# Altium PCB IMUCubeSL_A_Pcb.PcbDoc
Units mil, origin at the board's own origin, x right, y up, seen from the top; angles counter-clockwise.
Board outline 866.14 x 866.14 mil, 2 copper layers (Top Layer, Bottom Layer), stack 38.583 mil thick; 9 components, 18 nets, 52 pads, 48 vias.
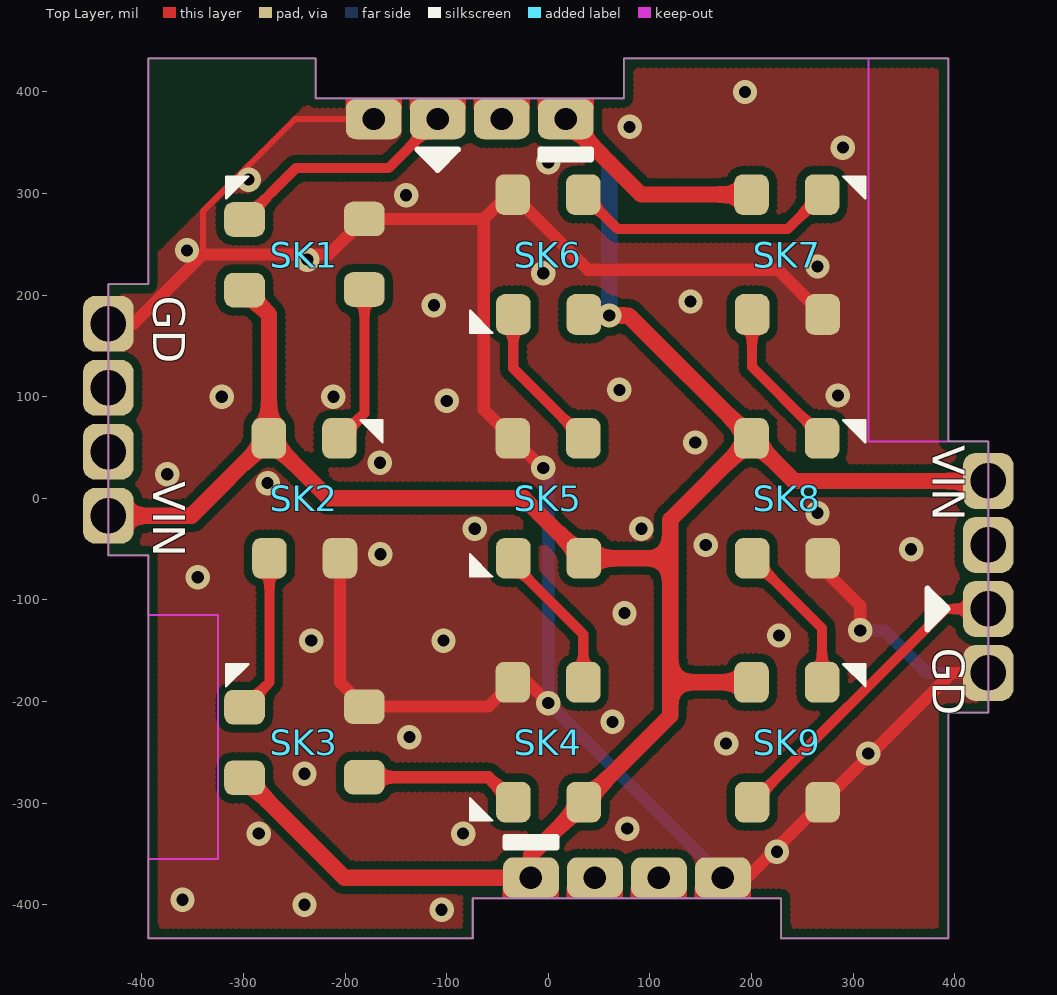
[diagram p0: Top Layer view]
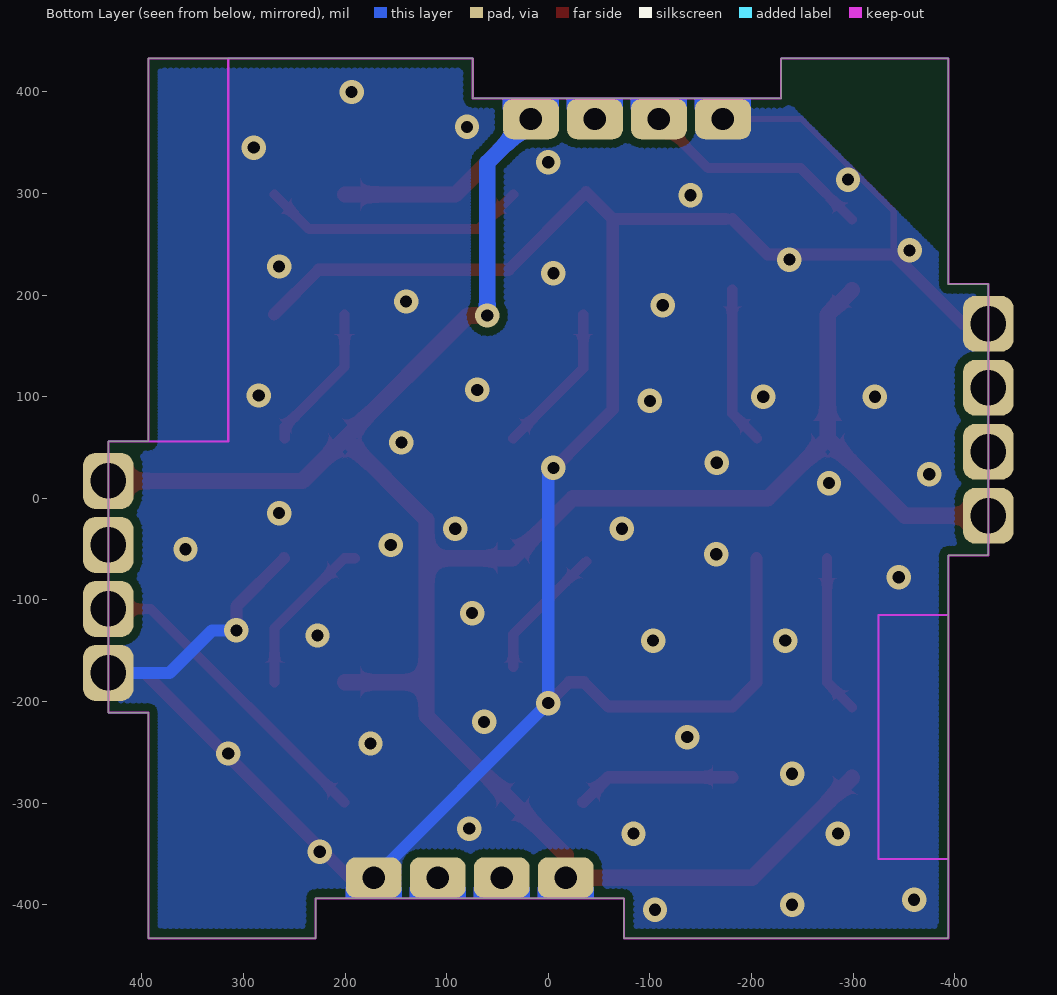
[diagram p1: Bottom Layer view, seen from below]
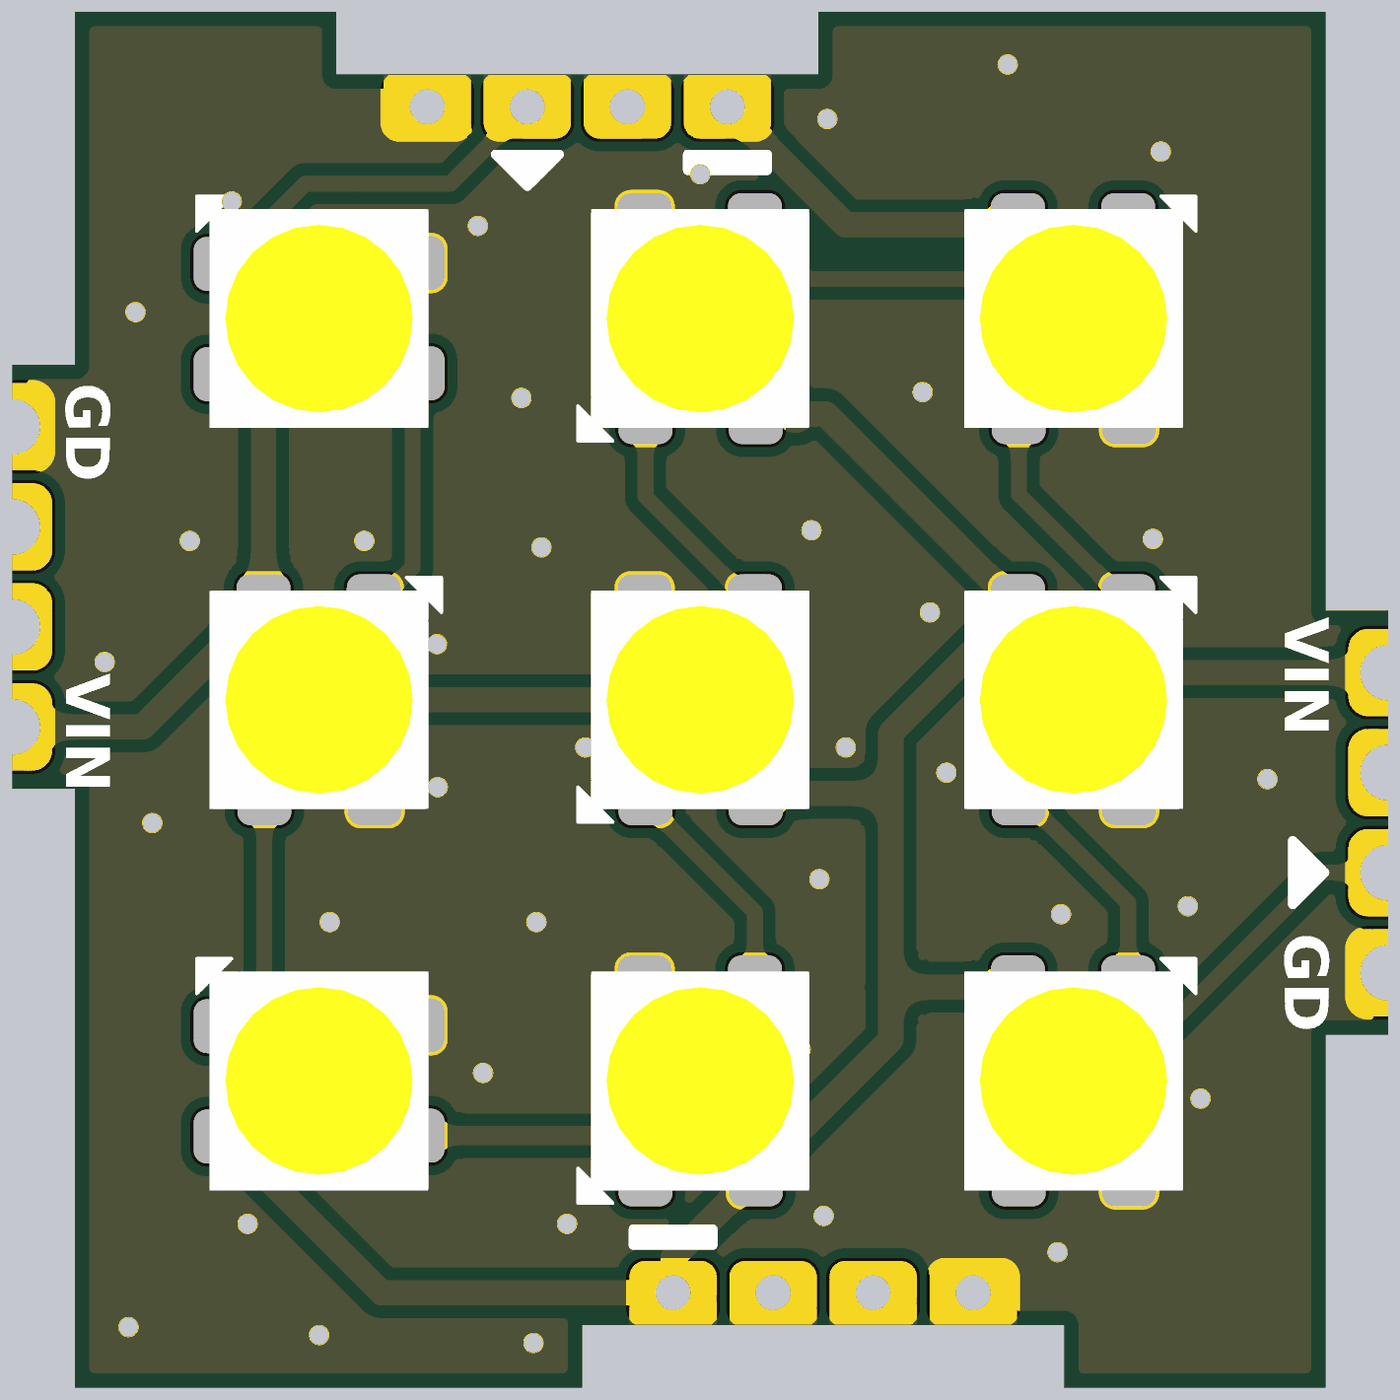
[diagram p2: 3D render of the assembled board from above, using the file's embedded part models]

## Layer stack, top to bottom
Top Solder: solder mask 0.3937, Solder Resist, Dk 3.5
Top Layer: signal copper 1.5748
Dielectric 1: dielectric 35.4331, FR-4, Dk 4.8
Bottom Layer: signal copper 1.5748
Bottom Solder: solder mask 0.3937, Solder Resist, Dk 3.5

## Board outline
-393.7,-433.07 -393.7,-56.06 -433.07,-56.06 -433.07,210.79 -393.7,210.79 -393.7,433.07 -229.09,433.07 -229.09,393.7 74.37,393.7 74.37,433.07 393.7,433.07 393.7,56.06 433.07,56.06 433.07,-210.79 393.7,-210.79 393.7,-433.07 229.09,-433.07 229.09,-393.7 -74.37,-393.7 -74.37,-433.07

## Design rules (kind name [scope] priority, off if disabled: settings)
Clearance ClearancePolygon [InPolygon] p1: gap=8
Clearance [All] p2: gap=6
ComponentClearance [All] p1: gap=0 collisioncheckmode=3 verticalgap=0 showdistances=FALSE
Height [All] p1: minheight=0 maxheight=5000 prefheight=500
HoleSize [All] p1: absolutevalues=TRUE maxlimit=200 minlimit=1 maxpercent=80.000 minpercent=20.000
HoleToHoleClearance [All] p1: gap=6 allowstackedmicrovias=TRUE
MinimumSolderMaskSliver [All] p1: minsoldermaskwidth=0
PolygonConnect [All] p1: connectstyle=Direct reliefconductorwidth=10 reliefentries=4 polygonreliefangle="90 Angle" airgapwidth=10
RoutingVias [All] p1: holewidth=12 width=24 viastyle="Through Hole" minholewidth=12 minwidth=20 maxholewidth=28 maxwidth=50
SilkToSilkClearance [All] p1: silktosilkclearance=0
SilkToSolderMaskClearance [IsPad] p1: minsilkscreentomaskgap=0 clearancetoexposedcopper=TRUE
SolderMaskExpansion [All] p1: expansion=2
Width [All] p1: maxlimit=50 minlimit=6 preferedwidth=10
23 further rules are at their usual default settings.

## Components (designator, comment, footprint, x,y, rotation, side; value= is the part's Value field where it differs from the comment)
SK1 "LED_3535_SK6812" LED_3535_4P -240,240 r180 top
SK2 "LED_3535_SK6812" LED_3535_4P -240,0 r90 top
SK3 "LED_3535_SK6812" LED_3535_4P -240,-240 r180 top
SK4 "LED_3535_SK6812" LED_3535_4P 0,-240 r270 top
SK5 "LED_3535_SK6812" LED_3535_4P 0,0 r270 top
SK6 "LED_3535_SK6812" LED_3535_4P 0,240 r270 top
SK7 "LED_3535_SK6812" LED_3535_4P 235,240 r90 top
SK8 "LED_3535_SK6812" LED_3535_4P 235,0 r90 top
SK9 "LED_3535_SK6812" LED_3535_4P 235,-240 r90 top

## Footprints (in the part's own frame and the unit in brackets; to place one, negate y for a bottom-side part, rotate by r counter-clockwise, add the part's x,y. Pads: shape width x height; smd on the part's side, far side on the other; paste and mask are expansions set on the pad)
LED_3535_4P [mil]
  rrect50% 40x34 smd: 1(-59,34.45) 2(-59,-35) 3(59,-34.45) 4(59,35)
  silkscreen extent 55,-77 77,-55, body extent -69,-69 69,69, height 26

## Part data
SK1 SK2 SK3 SK4 SK5 SK6 SK7 SK8 SK9: "LED"

## Free pads (board coordinates)
  rrect50% 50x55 hole 35: 0(-433.07,-17.13) 0(-433.07,45.87) 0(-433.07,108.86) 0(-433.07,171.85) 0(433.07,-171.85) 0(433.07,-108.86) 0(433.07,17.13) 0(433.07,-45.87)
  rrect50% 55x40 hole 22: 0(-171.85,373.37) 0(-108.86,373.37) 0(-45.87,373.37) 0(-17.13,-373.37) 0(17.13,373.37) 0(45.87,-373.37) 0(108.86,-373.37) 0(171.85,-373.37)

## Via types
v1: diameter 24, hole 12, Top Layer to Bottom Layer, 48 vias

## Nets (pads, with @x,y where several pads share a name; then routed paths per layer and width w, separated by ;. In a path a pad name is that pad's centre, name@x,y a point inside that pad or via, vN(x,y) a via of type N, cw(c..) or ccw(c..) an arc to the next point about the centre after c; other vN are vias at no path point)
3V3: 
BUZZER: 
DIN: 
DOUT: pad.0@-108.86,373.37 SK1.3 | length 231.1
  Top Layer w10: SK1.3 -248.45,325 -157.23,325 pad.0@-108.86,373.37
GND: pad.0@171.85,-373.37 pad.0@433.07,-171.85 pad.0@-171.85,373.37 pad.0@-433.07,171.85 SK1.2 SK2.2 SK3.2 SK4.2 SK5.2 SK6.2 SK7.2 SK8.2 SK9.2 | length 2725.3
  Top Layer w6: -340,240 -340,282.44 -249.07,373.37 pad.0@-171.85,373.37
  Top Layer w12: pad.0@-433.07,171.85 -408.15,171.85 -340,240 -216,240 SK1.2 ; SK2.2 -205,-181 SK3.2 -59,-205 SK4.2 -20.52,-181 v1(0,-201.52) ; SK1.2@-175,275 -63.45,275 ; SK6.2@-37.22,301.22 -63.45,275 ; SK6.2 39,225 226,225 SK7.2 ; v1(-5,30) -5,29 SK5.2 -63.45,87.45 -63.45,275 ; pad.0@171.85,-373.37 195.63,-373.37 SK9.2 397.15,-171.85 pad.0@433.07,-171.85 ; SK8.2@260,-59 306.97,-105.97 v1(306.97,-130)
  Bottom Layer w12: v1@0,30 v1(0,-201.52) pad.0@171.85,-373.37 ; v1(306.97,-130) 331,-130 372.85,-171.85 pad.0@433.07,-171.85
  other v1: -105,-405 -240,-400 -360,-395 225,-347.84 -285,-330 -83.89,-330 77.71,-325 -240,-271.15 315,-251.17 175,-241.27 -136.74,-235 63.22,-220 -233.3,-140 -103.2,-140 227.12,-135 75,-112.98 -345,-77.65 -165.28,-55 357.08,-50 155,-45.91 -72.39,-30 91.66,-30 265,-14.49 -276.3,15 -375,23.78 -165.79,35 144.6,55 -100,95.96 -321.41,100 -211.52,100 285,101.28 70,106.74 -112.61,190 140,193.71 -5,221.57 265,228.2 -237.32,235 -355.59,244.07 -140,298.38 -295,313.74 0,330.89 290,345.18 80,365.64 193.56,400
KEY: 
NetBUZZER_N: 
NetQ1_1: 
NetSK1_1: SK1.1 SK2.3 | length 156.7
  Top Layer w10: SK2.3 -181,83.55 SK1.1
NetSK2_1: SK2.1 SK3.3 | length 156.7
  Top Layer w10: SK3.3 -274.45,-181 SK2.1
NetSK3_1: SK3.1 SK4.3 | length 156.7
  Top Layer w12: SK3.1 -59,-274.45 SK4.3
NetSK4_1: SK4.1 SK5.3 | length 133.8
  Top Layer w10: SK5.3@-37.45,-62 34.45,-133.9 SK4.1@34.45,-166
NetSK5_1: SK5.1 SK6.3 | length 150.5
  Top Layer w10: SK6.3 -34.45,127.9 SK5.1
NetSK6_1: SK6.1 SK7.3 | length 263.2
  Top Layer w10: SK6.1 68.45,265 235.45,265 SK7.3
NetSK7_1: SK7.1 SK8.3 | length 146.4
  Top Layer w10: SK7.1 200.55,129.45 259.45,70.55 SK8.3@259.45,59
NetSK8_1: SK8.1 SK9.3 | length 160.5
  Top Layer w10: SK8.1@190.55,-59 SK8.1 269.45,-127.9 SK9.3
NEXT: pad.0@433.07,-108.86 SK9.1 | length 311.1
  Top Layer w10: SK9.1@200.78,-299.22 391.14,-108.86 pad.0@433.07,-108.86
VIN: pad.0@17.13,373.37 pad.0@433.07,17.13 pad.0@-17.13,-373.37 pad.0@-433.07,-17.13 SK1.4 SK2.4 SK3.4 SK4.4 SK5.4 SK6.4 SK7.4 SK8.4 SK9.4 | length 2579.7
  Top Layer w16: pad.0@-433.07,-17.13 -351.13,-17.13 SK2.4 ; SK3.4 -200.63,-373.37 -17.13,-373.37 -17.13,-351.13 120,-214 120,-21 SK8.4 ; SK1.4 -275,181 SK2.4 ; pad.0@17.13,373.37 91.5,299 SK7.4 ; v1(60,180) 79,180 SK8.4 ; 120,-181 SK9.4 ; 120,-59 SK5.4 -24,0 -216,0 SK2.4 ; pad.0@433.07,17.13 241.87,17.13 SK8.4
  Bottom Layer w16: pad.0@17.13,373.37 60,330.5 v1(60,180)

## Polygon pours and split planes (outlines as drawn)
no net on Keep-Out Layer "keepout" (none): -393.7,-433.07 -393.7,-56.06 -433.07,-56.06 -433.07,210.79 -393.7,210.79 -393.7,433.07 -229.09,433.07 -229.09,393.7 74.37,393.7 74.37,433.07 393.7,433.07 393.7,56.06 433.07,56.06 433.07,-210.79 393.7,-210.79 393.7,-433.07 229.09,-433.07 229.09,-393.7 -74.37,-393.7 -74.37,-433.07
no net on Keep-Out Layer "keepout" (none, shelved): -393.7,-433.07 -393.7,-355 -325,-355 -325,-115 -393.7,-115 -393.7,-56.06 -433.07,-56.06 -433.07,210.79 -393.7,210.79 -393.7,433.07 -229.09,433.07 -229.09,393.7 74.37,393.7 74.37,433.07 315,433.07 315,56.06 433.07,56.06 433.07,-210.79 393.7,-210.79 393.7,-433.07 229.09,-433.07 229.09,-393.7 -74.37,-393.7 -74.37,-433.07
GND on Top Layer "topLayer" (hatched 45Degree grid 4 track 6, remove dead copper, pour order 8): -393.7,-433.07 -393.7,-56.06 -433.07,-56.06 -433.07,210.79 -393.7,210.79 -393.7,433.07 -229.09,433.07 -229.09,393.7 74.37,393.7 74.37,433.07 393.7,433.07 393.7,56.06 433.07,56.06 433.07,-210.79 393.7,-210.79 393.7,-433.07 229.09,-433.07 229.09,-393.7 -74.37,-393.7 -74.37,-433.07
GND on Top Layer "topLayer" (hatched 45Degree grid 4 track 6, remove dead copper, shelved, pour order 5): -393.7,-433.07 -393.7,-355 -325,-355 -325,-115 -393.7,-115 -393.7,-56.06 -433.07,-56.06 -433.07,210.79 -393.7,210.79 -393.7,433.07 -229.09,433.07 -229.09,393.7 74.37,393.7 74.37,433.07 315,433.07 315,56.06 433.07,56.06 433.07,-210.79 393.7,-210.79 393.7,-433.07 229.09,-433.07 229.09,-393.7 -74.37,-393.7 -74.37,-433.07
GND on Bottom Layer "bottomLayer" (hatched 45Degree grid 4 track 6, remove dead copper, pour order 9): -393.7,-433.07 -393.7,-56.06 -433.07,-56.06 -433.07,210.79 -393.7,210.79 -393.7,433.07 -229.09,433.07 -229.09,393.7 74.37,393.7 74.37,433.07 393.7,433.07 393.7,56.06 433.07,56.06 433.07,-210.79 393.7,-210.79 393.7,-433.07 229.09,-433.07 229.09,-393.7 -74.37,-393.7 -74.37,-433.07
GND on Bottom Layer "bottomLayer" (hatched 45Degree grid 4 track 6, remove dead copper, shelved, pour order 7): -393.7,-433.07 -393.7,-355 -325,-355 -325,-115 -393.7,-115 -393.7,-56.06 -433.07,-56.06 -433.07,210.79 -393.7,210.79 -393.7,433.07 -229.09,433.07 -229.09,393.7 74.37,393.7 74.37,433.07 315,433.07 315,56.06 433.07,56.06 433.07,-210.79 393.7,-210.79 393.7,-433.07 229.09,-433.07 229.09,-393.7 -74.37,-393.7 -74.37,-433.07

## Other copper
Top Layer:
  pour cut-out: -393.7,229.09 -229.09,393.7 -229.09,433.07 -393.7,433.07
Bottom Layer:
  pour cut-out: -393.7,229.09 -229.09,393.7 -229.09,433.07 -393.7,433.07
Multi-Layer:
  region: -73.37,382.87 -18.37,382.87 -18.37,393.37 -73.37,393.37
  region net DOUT: -136.36,382.87 -81.36,382.87 -81.36,393.37 -136.36,393.37
  region net VIN: 10.37,-382.87 -44.63,-382.87 -44.63,-393.37 10.37,-393.37
  region net GND: -199.35,382.87 -144.35,382.87 -144.35,393.37 -199.35,393.37
  region net VIN: -10.37,382.87 44.63,382.87 44.63,393.37 -10.37,393.37
  region: 73.37,-382.87 18.37,-382.87 18.37,-393.37 73.37,-393.37
  region net GND: 199.35,-382.87 144.35,-382.87 144.35,-393.37 199.35,-393.37
  region: 136.36,-382.87 81.36,-382.87 81.36,-393.37 136.36,-393.37

## Silkscreen, mask and mechanical layers (free items; w line width, h text height)
Top Overlay:
  region: 393.07,-108.86 373.07,-128.86 373.07,-88.86
  region: -108.86,323.37 -128.86,343.37 -88.86,343.37
  region: 42.13,333.37 -7.87,333.37 -7.87,343.37 42.13,343.37
  region: -42.13,-333.37 7.87,-333.37 7.87,-343.37 -42.13,-343.37
  lines w6: -128.86,343.37 -88.86,343.37 -108.86,323.37 -128.86,343.37 ; -42.13,-343.37 -42.13,-333.37 7.87,-333.37 7.87,-343.37 -42.13,-343.37 ; -7.87,333.37 -7.87,343.37 42.13,343.37 42.13,333.37 -7.87,333.37 ; 373.07,-128.86 373.07,-88.86 393.07,-108.86 373.07,-128.86
  text "GD" at -399.37,199.61 h54 r270
  text "VIN" at 368.07,52.13 h54 r270
  text "VIN" at -399.37,16.65 h54 r270
  text "GD" at 368.07,-146.85 h54 r270
Mechanical 1:
  the board outline again, w2